# EAGLE board BMP180-Breakout-Panel-v10 (EAGLE 6.5.0), part 1 of 2
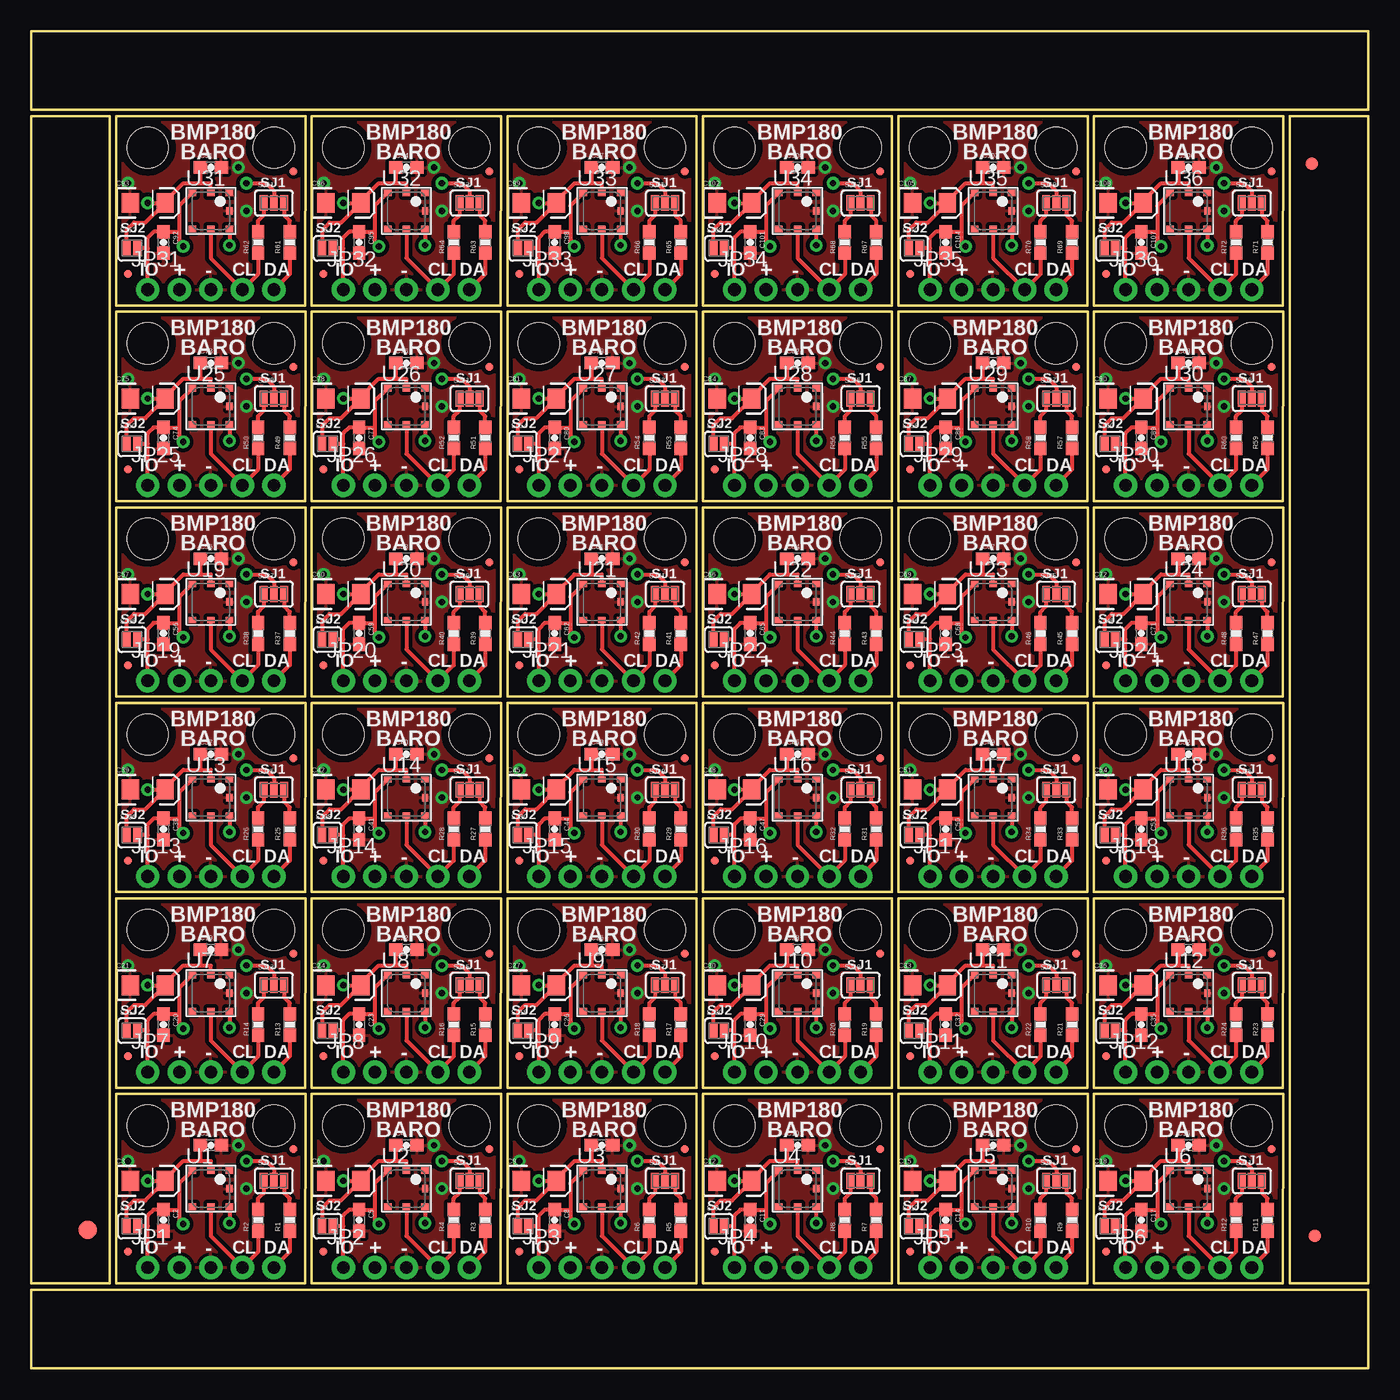
[diagram p0: board, top side]
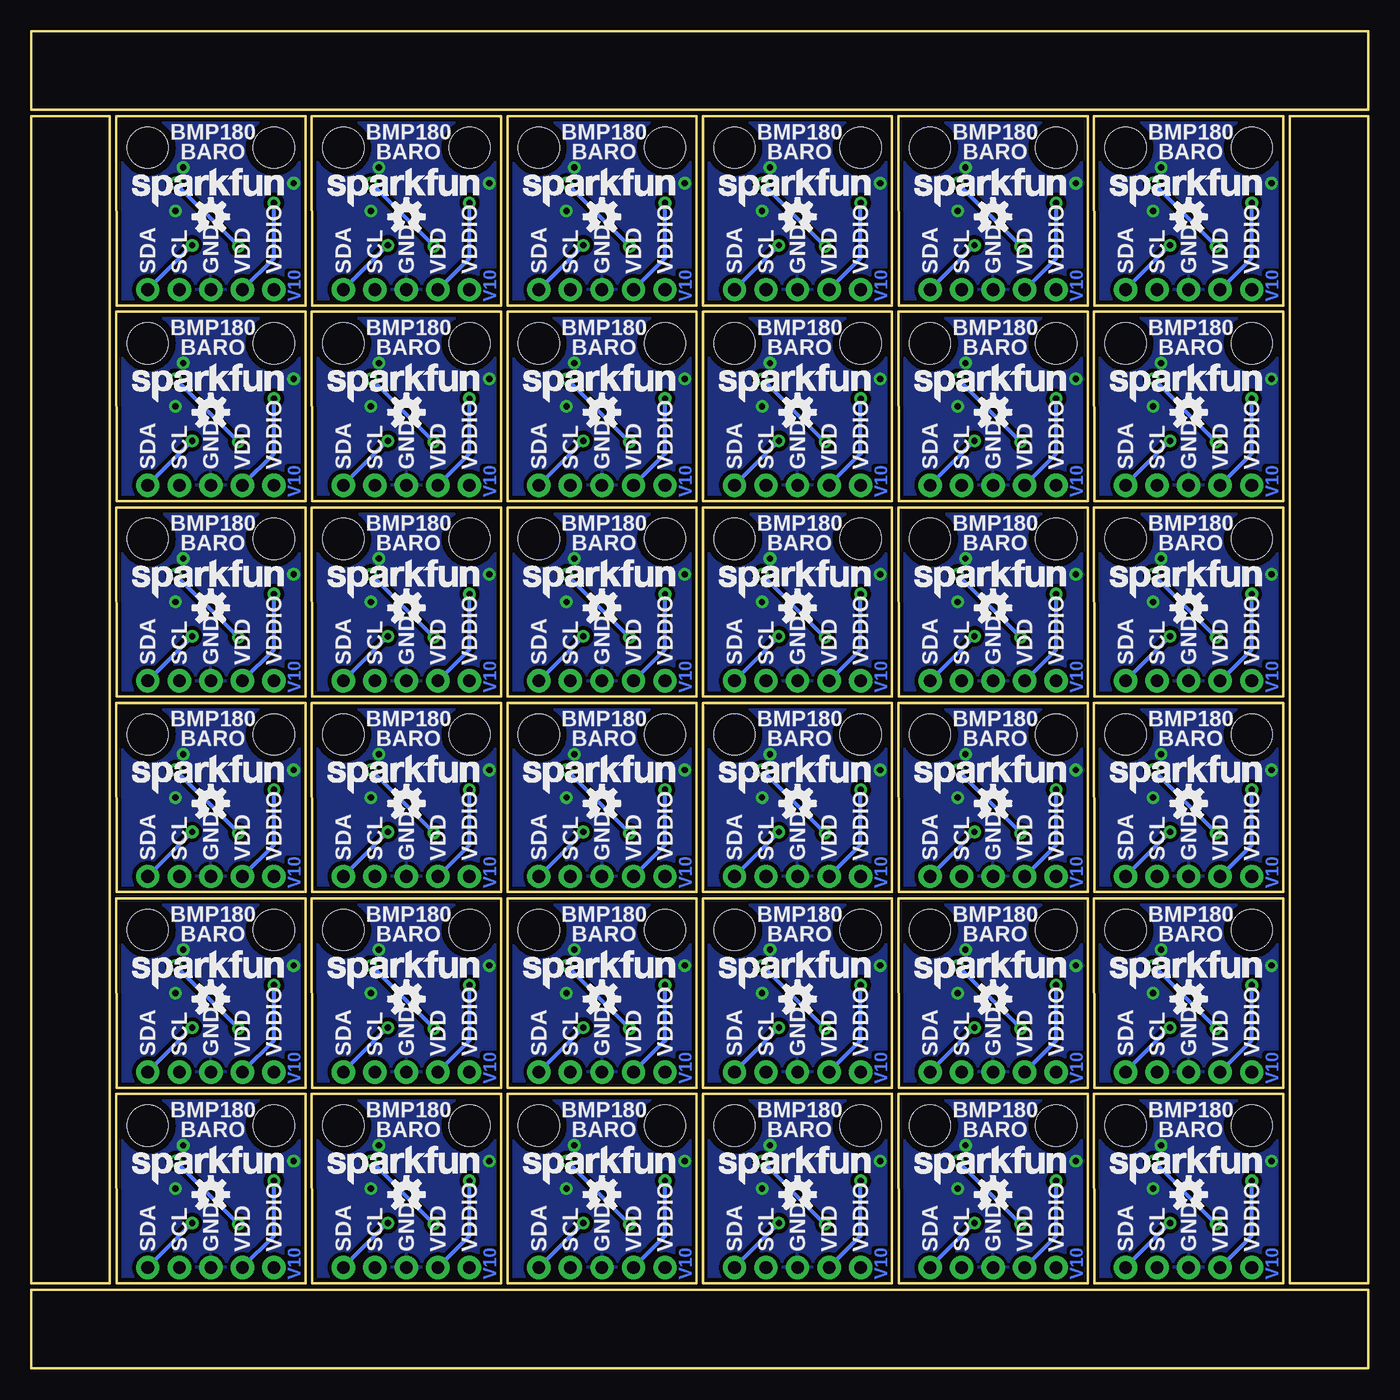
[diagram p1: board, bottom side, seen from below]

Size 107.7 x 107.7 mm. Coordinates in mm from the lower left corner, seen from the top.
Outline: 168 segments
Copper layers (1*16): Top 0.035mm / dielectric 1.5mm / Bottom 0.035mm
Design rules "SparkFun *": minimum track width 7mil, minimum drill 15mil, track to track 8mil, track to pad 8mil, pad to pad 8mil, via to via 8mil, smd to smd 8mil, copper to edge 8mil, drill to drill 8mil, minimum pad ring 12mil, minimum via ring 10mil, stop-mask expansion 4mil, vias tented up to drill 20mil, thermal gap 10mil

## Footprints (pad centres in the part's own frame; a part is rotated, then mirrored left to right if it is on the bottom)
0603-CAP = smd 1.1 x 1: 1 -0.85,0; 2 0.85,0
EIA3216 = smd 1.4 x 1.6: A 1.4,0; C -1.4,0
FIDUCIAL-1.5X3 = smd 1.5 x 1.5: 1 0,0
FIDUCIAL-1X2 = smd 1 x 1: 1 0,0
MICRO-FIDUCIAL = smd 0.635 x 0.635: 1 0,0
1X05_ROUNDONLY_NOSILK = drill 1.016 pad 1.88: 1 0,0; 2 2.54,0; 3 5.08,0; 4 7.62,0; 5 10.16,0
0603-RES = smd 1.1 x 1: 1 -0.85,0; 2 0.85,0
SJ_3_PASTE1&2&3 = smd 0.635 x 1.27: 1 -0.813,0; 2 0,0; 3 0.813,0
SJ_2S = smd 0.635 x 1.27: 1 -0.412,0; 2 0.412,0
STAND-OFF = hole 3.302: 0,0
BMP180 = smd 0.6 x 0.5: 1 1.5,1.45; 2 0,1.45; 3 -1.5,1.45; 4 -1.5,-1.45; 5 0,-1.45; 6 1.5,-1.45 | smd 0.5 x 0.6: 7 1.5,0

## Placement (x,y rotation side)
C1  0.1uF  [0603-CAP]  14.48,17.97 0 top
C2  0.1uF  [0603-CAP]  10.67,11.94 270 top
C3  10uF  [EIA3216]  9.4,15.11 0 top
C4  0.1uF  [0603-CAP]  30.23,17.97 0 top
C5  0.1uF  [0603-CAP]  26.42,11.94 270 top
C6  10uF  [EIA3216]  25.15,15.11 0 top
C7  0.1uF  [0603-CAP]  45.97,17.97 0 top
C8  0.1uF  [0603-CAP]  42.16,11.94 270 top
C9  10uF  [EIA3216]  40.89,15.11 0 top
C10  0.1uF  [0603-CAP]  61.72,17.97 0 top
C11  0.1uF  [0603-CAP]  57.91,11.94 270 top
C12  10uF  [EIA3216]  56.64,15.11 0 top
C13  0.1uF  [0603-CAP]  77.47,17.97 0 top
C14  0.1uF  [0603-CAP]  73.66,11.94 270 top
C15  10uF  [EIA3216]  72.39,15.11 0 top
C16  0.1uF  [0603-CAP]  93.22,17.97 0 top
C17  0.1uF  [0603-CAP]  89.41,11.94 270 top
C18  10uF  [EIA3216]  88.14,15.11 0 top
C19  0.1uF  [0603-CAP]  14.48,33.72 0 top
C20  0.1uF  [0603-CAP]  10.67,27.69 270 top
C21  10uF  [EIA3216]  9.4,30.86 0 top
C22  0.1uF  [0603-CAP]  30.23,33.72 0 top
C23  0.1uF  [0603-CAP]  26.42,27.69 270 top
C24  10uF  [EIA3216]  25.15,30.86 0 top
C25  0.1uF  [0603-CAP]  45.97,33.72 0 top
C26  0.1uF  [0603-CAP]  42.16,27.69 270 top
C27  10uF  [EIA3216]  40.89,30.86 0 top
C28  0.1uF  [0603-CAP]  61.72,33.72 0 top
C29  0.1uF  [0603-CAP]  57.91,27.69 270 top
C30  10uF  [EIA3216]  56.64,30.86 0 top
C31  0.1uF  [0603-CAP]  77.47,33.72 0 top
C32  0.1uF  [0603-CAP]  73.66,27.69 270 top
C33  10uF  [EIA3216]  72.39,30.86 0 top
C34  0.1uF  [0603-CAP]  93.22,33.72 0 top
C35  0.1uF  [0603-CAP]  89.41,27.69 270 top
C36  10uF  [EIA3216]  88.14,30.86 0 top
C37  0.1uF  [0603-CAP]  14.48,49.47 0 top
C38  0.1uF  [0603-CAP]  10.67,43.43 270 top
C39  10uF  [EIA3216]  9.4,46.61 0 top
C40  0.1uF  [0603-CAP]  30.23,49.47 0 top
C41  0.1uF  [0603-CAP]  26.42,43.43 270 top
C42  10uF  [EIA3216]  25.15,46.61 0 top
C43  0.1uF  [0603-CAP]  45.97,49.47 0 top
C44  0.1uF  [0603-CAP]  42.16,43.43 270 top
C45  10uF  [EIA3216]  40.89,46.61 0 top
C46  0.1uF  [0603-CAP]  61.72,49.47 0 top
C47  0.1uF  [0603-CAP]  57.91,43.43 270 top
C48  10uF  [EIA3216]  56.64,46.61 0 top
C49  0.1uF  [0603-CAP]  77.47,49.47 0 top
C50  0.1uF  [0603-CAP]  73.66,43.43 270 top
C51  10uF  [EIA3216]  72.39,46.61 0 top
C52  0.1uF  [0603-CAP]  93.22,49.47 0 top
C53  0.1uF  [0603-CAP]  89.41,43.43 270 top
C54  10uF  [EIA3216]  88.14,46.61 0 top
C55  0.1uF  [0603-CAP]  14.48,65.21 0 top
C56  0.1uF  [0603-CAP]  10.67,59.18 270 top
C57  10uF  [EIA3216]  9.4,62.36 0 top
C58  0.1uF  [0603-CAP]  30.23,65.21 0 top
C59  0.1uF  [0603-CAP]  26.42,59.18 270 top
C60  10uF  [EIA3216]  25.15,62.36 0 top
C61  0.1uF  [0603-CAP]  45.97,65.21 0 top
C62  0.1uF  [0603-CAP]  42.16,59.18 270 top
C63  10uF  [EIA3216]  40.89,62.36 0 top
C64  0.1uF  [0603-CAP]  61.72,65.21 0 top
C65  0.1uF  [0603-CAP]  57.91,59.18 270 top
C66  10uF  [EIA3216]  56.64,62.36 0 top
C67  0.1uF  [0603-CAP]  77.47,65.21 0 top
C68  0.1uF  [0603-CAP]  73.66,59.18 270 top
C69  10uF  [EIA3216]  72.39,62.36 0 top
C70  0.1uF  [0603-CAP]  93.22,65.21 0 top
C71  0.1uF  [0603-CAP]  89.41,59.18 270 top
C72  10uF  [EIA3216]  88.14,62.36 0 top
C73  0.1uF  [0603-CAP]  14.48,80.96 0 top
C74  0.1uF  [0603-CAP]  10.67,74.93 270 top
C75  10uF  [EIA3216]  9.4,78.11 0 top
C76  0.1uF  [0603-CAP]  30.23,80.96 0 top
C77  0.1uF  [0603-CAP]  26.42,74.93 270 top
C78  10uF  [EIA3216]  25.15,78.11 0 top
C79  0.1uF  [0603-CAP]  45.97,80.96 0 top
C80  0.1uF  [0603-CAP]  42.16,74.93 270 top
C81  10uF  [EIA3216]  40.89,78.11 0 top
C82  0.1uF  [0603-CAP]  61.72,80.96 0 top
C83  0.1uF  [0603-CAP]  57.91,74.93 270 top
C84  10uF  [EIA3216]  56.64,78.11 0 top
C85  0.1uF  [0603-CAP]  77.47,80.96 0 top
C86  0.1uF  [0603-CAP]  73.66,74.93 270 top
C87  10uF  [EIA3216]  72.39,78.11 0 top
C88  0.1uF  [0603-CAP]  93.22,80.96 0 top
C89  0.1uF  [0603-CAP]  89.41,74.93 270 top
C90  10uF  [EIA3216]  88.14,78.11 0 top
C91  0.1uF  [0603-CAP]  14.48,96.71 0 top
C92  0.1uF  [0603-CAP]  10.67,90.68 270 top
C93  10uF  [EIA3216]  9.4,93.85 0 top
C94  0.1uF  [0603-CAP]  30.23,96.71 0 top
C95  0.1uF  [0603-CAP]  26.42,90.68 270 top
C96  10uF  [EIA3216]  25.15,93.85 0 top
C97  0.1uF  [0603-CAP]  45.97,96.71 0 top
C98  0.1uF  [0603-CAP]  42.16,90.68 270 top
C99  10uF  [EIA3216]  40.89,93.85 0 top
C100  0.1uF  [0603-CAP]  61.72,96.71 0 top
C101  0.1uF  [0603-CAP]  57.91,90.68 270 top
C102  10uF  [EIA3216]  56.64,93.85 0 top
C103  0.1uF  [0603-CAP]  77.47,96.71 0 top
C104  0.1uF  [0603-CAP]  73.66,90.68 270 top
C105  10uF  [EIA3216]  72.39,93.85 0 top
C106  0.1uF  [0603-CAP]  93.22,96.71 0 top
C107  0.1uF  [0603-CAP]  89.41,90.68 270 top
C108  10uF  [EIA3216]  88.14,93.85 0 top
E$1  [FIDUCIAL-1.5X3]  4.57,11.18 0 top
E$4  [FIDUCIAL-1X2]  103.38,10.67 0 top
E$8  [FIDUCIAL-1X2]  103.12,97.03 180 top
FID1  FIDUCIALUFIDUCIAL  [MICRO-FIDUCIAL]  21.15,17.65 0 top
FID2  FIDUCIALUFIDUCIAL  [MICRO-FIDUCIAL]  7.81,9.4 0 top
FID3  FIDUCIALUFIDUCIAL  [MICRO-FIDUCIAL]  36.89,17.65 0 top
FID4  FIDUCIALUFIDUCIAL  [MICRO-FIDUCIAL]  23.56,9.4 0 top
FID5  FIDUCIALUFIDUCIAL  [MICRO-FIDUCIAL]  52.64,17.65 0 top
FID6  FIDUCIALUFIDUCIAL  [MICRO-FIDUCIAL]  39.31,9.4 0 top
FID7  FIDUCIALUFIDUCIAL  [MICRO-FIDUCIAL]  68.39,17.65 0 top
FID8  FIDUCIALUFIDUCIAL  [MICRO-FIDUCIAL]  55.05,9.4 0 top
FID9  FIDUCIALUFIDUCIAL  [MICRO-FIDUCIAL]  84.14,17.65 0 top
FID10  FIDUCIALUFIDUCIAL  [MICRO-FIDUCIAL]  70.8,9.4 0 top
FID11  FIDUCIALUFIDUCIAL  [MICRO-FIDUCIAL]  99.89,17.65 0 top
FID12  FIDUCIALUFIDUCIAL  [MICRO-FIDUCIAL]  86.55,9.4 0 top
FID13  FIDUCIALUFIDUCIAL  [MICRO-FIDUCIAL]  21.15,33.4 0 top
FID14  FIDUCIALUFIDUCIAL  [MICRO-FIDUCIAL]  7.81,25.15 0 top
FID15  FIDUCIALUFIDUCIAL  [MICRO-FIDUCIAL]  36.89,33.4 0 top
FID16  FIDUCIALUFIDUCIAL  [MICRO-FIDUCIAL]  23.56,25.15 0 top
FID17  FIDUCIALUFIDUCIAL  [MICRO-FIDUCIAL]  52.64,33.4 0 top
FID18  FIDUCIALUFIDUCIAL  [MICRO-FIDUCIAL]  39.31,25.15 0 top
FID19  FIDUCIALUFIDUCIAL  [MICRO-FIDUCIAL]  68.39,33.4 0 top
FID20  FIDUCIALUFIDUCIAL  [MICRO-FIDUCIAL]  55.05,25.15 0 top
FID21  FIDUCIALUFIDUCIAL  [MICRO-FIDUCIAL]  84.14,33.4 0 top
FID22  FIDUCIALUFIDUCIAL  [MICRO-FIDUCIAL]  70.8,25.15 0 top
FID23  FIDUCIALUFIDUCIAL  [MICRO-FIDUCIAL]  99.89,33.4 0 top
FID24  FIDUCIALUFIDUCIAL  [MICRO-FIDUCIAL]  86.55,25.15 0 top
FID25  FIDUCIALUFIDUCIAL  [MICRO-FIDUCIAL]  21.15,49.15 0 top
FID26  FIDUCIALUFIDUCIAL  [MICRO-FIDUCIAL]  7.81,40.89 0 top
FID27  FIDUCIALUFIDUCIAL  [MICRO-FIDUCIAL]  36.89,49.15 0 top
FID28  FIDUCIALUFIDUCIAL  [MICRO-FIDUCIAL]  23.56,40.89 0 top
FID29  FIDUCIALUFIDUCIAL  [MICRO-FIDUCIAL]  52.64,49.15 0 top
FID30  FIDUCIALUFIDUCIAL  [MICRO-FIDUCIAL]  39.31,40.89 0 top
FID31  FIDUCIALUFIDUCIAL  [MICRO-FIDUCIAL]  68.39,49.15 0 top
FID32  FIDUCIALUFIDUCIAL  [MICRO-FIDUCIAL]  55.05,40.89 0 top
FID33  FIDUCIALUFIDUCIAL  [MICRO-FIDUCIAL]  84.14,49.15 0 top
FID34  FIDUCIALUFIDUCIAL  [MICRO-FIDUCIAL]  70.8,40.89 0 top
FID35  FIDUCIALUFIDUCIAL  [MICRO-FIDUCIAL]  99.89,49.15 0 top
FID36  FIDUCIALUFIDUCIAL  [MICRO-FIDUCIAL]  86.55,40.89 0 top
FID37  FIDUCIALUFIDUCIAL  [MICRO-FIDUCIAL]  21.15,64.9 0 top
FID38  FIDUCIALUFIDUCIAL  [MICRO-FIDUCIAL]  7.81,56.64 0 top
FID39  FIDUCIALUFIDUCIAL  [MICRO-FIDUCIAL]  36.89,64.9 0 top
FID40  FIDUCIALUFIDUCIAL  [MICRO-FIDUCIAL]  23.56,56.64 0 top
FID41  FIDUCIALUFIDUCIAL  [MICRO-FIDUCIAL]  52.64,64.9 0 top
FID42  FIDUCIALUFIDUCIAL  [MICRO-FIDUCIAL]  39.31,56.64 0 top
FID43  FIDUCIALUFIDUCIAL  [MICRO-FIDUCIAL]  68.39,64.9 0 top
FID44  FIDUCIALUFIDUCIAL  [MICRO-FIDUCIAL]  55.05,56.64 0 top
FID45  FIDUCIALUFIDUCIAL  [MICRO-FIDUCIAL]  84.14,64.9 0 top
FID46  FIDUCIALUFIDUCIAL  [MICRO-FIDUCIAL]  70.8,56.64 0 top
FID47  FIDUCIALUFIDUCIAL  [MICRO-FIDUCIAL]  99.89,64.9 0 top
FID48  FIDUCIALUFIDUCIAL  [MICRO-FIDUCIAL]  86.55,56.64 0 top
FID49  FIDUCIALUFIDUCIAL  [MICRO-FIDUCIAL]  21.15,80.64 0 top
FID50  FIDUCIALUFIDUCIAL  [MICRO-FIDUCIAL]  7.81,72.39 0 top
FID51  FIDUCIALUFIDUCIAL  [MICRO-FIDUCIAL]  36.89,80.64 0 top
FID52  FIDUCIALUFIDUCIAL  [MICRO-FIDUCIAL]  23.56,72.39 0 top
FID53  FIDUCIALUFIDUCIAL  [MICRO-FIDUCIAL]  52.64,80.64 0 top
FID54  FIDUCIALUFIDUCIAL  [MICRO-FIDUCIAL]  39.31,72.39 0 top
FID55  FIDUCIALUFIDUCIAL  [MICRO-FIDUCIAL]  68.39,80.64 0 top
FID56  FIDUCIALUFIDUCIAL  [MICRO-FIDUCIAL]  55.05,72.39 0 top
FID57  FIDUCIALUFIDUCIAL  [MICRO-FIDUCIAL]  84.14,80.64 0 top
FID58  FIDUCIALUFIDUCIAL  [MICRO-FIDUCIAL]  70.8,72.39 0 top
FID59  FIDUCIALUFIDUCIAL  [MICRO-FIDUCIAL]  99.89,80.64 0 top
FID60  FIDUCIALUFIDUCIAL  [MICRO-FIDUCIAL]  86.55,72.39 0 top
FID61  FIDUCIALUFIDUCIAL  [MICRO-FIDUCIAL]  21.15,96.39 0 top
FID62  FIDUCIALUFIDUCIAL  [MICRO-FIDUCIAL]  7.81,88.14 0 top
FID63  FIDUCIALUFIDUCIAL  [MICRO-FIDUCIAL]  36.89,96.39 0 top
FID64  FIDUCIALUFIDUCIAL  [MICRO-FIDUCIAL]  23.56,88.14 0 top
FID65  FIDUCIALUFIDUCIAL  [MICRO-FIDUCIAL]  52.64,96.39 0 top
FID66  FIDUCIALUFIDUCIAL  [MICRO-FIDUCIAL]  39.31,88.14 0 top
FID67  FIDUCIALUFIDUCIAL  [MICRO-FIDUCIAL]  68.39,96.39 0 top
FID68  FIDUCIALUFIDUCIAL  [MICRO-FIDUCIAL]  55.05,88.14 0 top
FID69  FIDUCIALUFIDUCIAL  [MICRO-FIDUCIAL]  84.14,96.39 0 top
FID70  FIDUCIALUFIDUCIAL  [MICRO-FIDUCIAL]  70.8,88.14 0 top
FID71  FIDUCIALUFIDUCIAL  [MICRO-FIDUCIAL]  99.89,96.39 0 top
FID72  FIDUCIALUFIDUCIAL  [MICRO-FIDUCIAL]  86.55,88.14 0 top
JP1  [1X05_ROUNDONLY_NOSILK]  9.4,8.13 0 top
JP2  [1X05_ROUNDONLY_NOSILK]  25.15,8.13 0 top
JP3  [1X05_ROUNDONLY_NOSILK]  40.89,8.13 0 top
JP4  [1X05_ROUNDONLY_NOSILK]  56.64,8.13 0 top
JP5  [1X05_ROUNDONLY_NOSILK]  72.39,8.13 0 top
JP6  [1X05_ROUNDONLY_NOSILK]  88.14,8.13 0 top
JP7  [1X05_ROUNDONLY_NOSILK]  9.4,23.88 0 top
JP8  [1X05_ROUNDONLY_NOSILK]  25.15,23.88 0 top
JP9  [1X05_ROUNDONLY_NOSILK]  40.89,23.88 0 top
JP10  [1X05_ROUNDONLY_NOSILK]  56.64,23.88 0 top
JP11  [1X05_ROUNDONLY_NOSILK]  72.39,23.88 0 top
JP12  [1X05_ROUNDONLY_NOSILK]  88.14,23.88 0 top
JP13  [1X05_ROUNDONLY_NOSILK]  9.4,39.62 0 top
JP14  [1X05_ROUNDONLY_NOSILK]  25.15,39.62 0 top
JP15  [1X05_ROUNDONLY_NOSILK]  40.89,39.62 0 top
JP16  [1X05_ROUNDONLY_NOSILK]  56.64,39.62 0 top
JP17  [1X05_ROUNDONLY_NOSILK]  72.39,39.62 0 top
JP18  [1X05_ROUNDONLY_NOSILK]  88.14,39.62 0 top
JP19  [1X05_ROUNDONLY_NOSILK]  9.4,55.37 0 top
JP20  [1X05_ROUNDONLY_NOSILK]  25.15,55.37 0 top
JP21  [1X05_ROUNDONLY_NOSILK]  40.89,55.37 0 top
JP22  [1X05_ROUNDONLY_NOSILK]  56.64,55.37 0 top
JP23  [1X05_ROUNDONLY_NOSILK]  72.39,55.37 0 top
JP24  [1X05_ROUNDONLY_NOSILK]  88.14,55.37 0 top
JP25  [1X05_ROUNDONLY_NOSILK]  9.4,71.12 0 top
JP26  [1X05_ROUNDONLY_NOSILK]  25.15,71.12 0 top
JP27  [1X05_ROUNDONLY_NOSILK]  40.89,71.12 0 top
JP28  [1X05_ROUNDONLY_NOSILK]  56.64,71.12 0 top
JP29  [1X05_ROUNDONLY_NOSILK]  72.39,71.12 0 top
JP30  [1X05_ROUNDONLY_NOSILK]  88.14,71.12 0 top
JP31  [1X05_ROUNDONLY_NOSILK]  9.4,86.87 0 top
JP32  [1X05_ROUNDONLY_NOSILK]  25.15,86.87 0 top
JP33  [1X05_ROUNDONLY_NOSILK]  40.89,86.87 0 top
JP34  [1X05_ROUNDONLY_NOSILK]  56.64,86.87 0 top
JP35  [1X05_ROUNDONLY_NOSILK]  72.39,86.87 0 top
JP36  [1X05_ROUNDONLY_NOSILK]  88.14,86.87 0 top
LOGO1  LOGO-SFENW2  [SFE-NEW-WEB]  20.83,14.8 0 bottom
LOGO2  OSHW-LOGOS  [OSHW-LOGO-S]  14.48,14 0 bottom
LOGO3  LOGO-SFENW2  [SFE-NEW-WEB]  36.58,14.8 0 bottom
LOGO4  OSHW-LOGOS  [OSHW-LOGO-S]  30.23,14 0 bottom
LOGO5  LOGO-SFENW2  [SFE-NEW-WEB]  52.32,14.8 0 bottom
LOGO6  OSHW-LOGOS  [OSHW-LOGO-S]  45.97,14 0 bottom
LOGO7  LOGO-SFENW2  [SFE-NEW-WEB]  68.07,14.8 0 bottom
LOGO8  OSHW-LOGOS  [OSHW-LOGO-S]  61.72,14 0 bottom
LOGO9  LOGO-SFENW2  [SFE-NEW-WEB]  83.82,14.8 0 bottom
LOGO10  OSHW-LOGOS  [OSHW-LOGO-S]  77.47,14 0 bottom
LOGO11  LOGO-SFENW2  [SFE-NEW-WEB]  99.57,14.8 0 bottom
LOGO12  OSHW-LOGOS  [OSHW-LOGO-S]  93.22,14 0 bottom
LOGO13  LOGO-SFENW2  [SFE-NEW-WEB]  20.83,30.54 0 bottom
LOGO14  OSHW-LOGOS  [OSHW-LOGO-S]  14.48,29.75 0 bottom
LOGO15  LOGO-SFENW2  [SFE-NEW-WEB]  36.58,30.54 0 bottom
LOGO16  OSHW-LOGOS  [OSHW-LOGO-S]  30.23,29.75 0 bottom
LOGO17  LOGO-SFENW2  [SFE-NEW-WEB]  52.32,30.54 0 bottom
LOGO18  OSHW-LOGOS  [OSHW-LOGO-S]  45.97,29.75 0 bottom
LOGO19  LOGO-SFENW2  [SFE-NEW-WEB]  68.07,30.54 0 bottom
LOGO20  OSHW-LOGOS  [OSHW-LOGO-S]  61.72,29.75 0 bottom
LOGO21  LOGO-SFENW2  [SFE-NEW-WEB]  83.82,30.54 0 bottom
LOGO22  OSHW-LOGOS  [OSHW-LOGO-S]  77.47,29.75 0 bottom
LOGO23  LOGO-SFENW2  [SFE-NEW-WEB]  99.57,30.54 0 bottom
LOGO24  OSHW-LOGOS  [OSHW-LOGO-S]  93.22,29.75 0 bottom
LOGO25  LOGO-SFENW2  [SFE-NEW-WEB]  20.83,46.29 0 bottom
LOGO26  OSHW-LOGOS  [OSHW-LOGO-S]  14.48,45.5 0 bottom
LOGO27  LOGO-SFENW2  [SFE-NEW-WEB]  36.58,46.29 0 bottom
LOGO28  OSHW-LOGOS  [OSHW-LOGO-S]  30.23,45.5 0 bottom
LOGO29  LOGO-SFENW2  [SFE-NEW-WEB]  52.32,46.29 0 bottom
LOGO30  OSHW-LOGOS  [OSHW-LOGO-S]  45.97,45.5 0 bottom
LOGO31  LOGO-SFENW2  [SFE-NEW-WEB]  68.07,46.29 0 bottom
LOGO32  OSHW-LOGOS  [OSHW-LOGO-S]  61.72,45.5 0 bottom
LOGO33  LOGO-SFENW2  [SFE-NEW-WEB]  83.82,46.29 0 bottom
LOGO34  OSHW-LOGOS  [OSHW-LOGO-S]  77.47,45.5 0 bottom
LOGO35  LOGO-SFENW2  [SFE-NEW-WEB]  99.57,46.29 0 bottom
LOGO36  OSHW-LOGOS  [OSHW-LOGO-S]  93.22,45.5 0 bottom
LOGO37  LOGO-SFENW2  [SFE-NEW-WEB]  20.83,62.04 0 bottom
LOGO38  OSHW-LOGOS  [OSHW-LOGO-S]  14.48,61.25 0 bottom
LOGO39  LOGO-SFENW2  [SFE-NEW-WEB]  36.58,62.04 0 bottom
LOGO40  OSHW-LOGOS  [OSHW-LOGO-S]  30.23,61.25 0 bottom
LOGO41  LOGO-SFENW2  [SFE-NEW-WEB]  52.32,62.04 0 bottom
LOGO42  OSHW-LOGOS  [OSHW-LOGO-S]  45.97,61.25 0 bottom
LOGO43  LOGO-SFENW2  [SFE-NEW-WEB]  68.07,62.04 0 bottom
LOGO44  OSHW-LOGOS  [OSHW-LOGO-S]  61.72,61.25 0 bottom
LOGO45  LOGO-SFENW2  [SFE-NEW-WEB]  83.82,62.04 0 bottom
LOGO46  OSHW-LOGOS  [OSHW-LOGO-S]  77.47,61.25 0 bottom
LOGO47  LOGO-SFENW2  [SFE-NEW-WEB]  99.57,62.04 0 bottom
LOGO48  OSHW-LOGOS  [OSHW-LOGO-S]  93.22,61.25 0 bottom
LOGO49  LOGO-SFENW2  [SFE-NEW-WEB]  20.83,77.79 0 bottom
LOGO50  OSHW-LOGOS  [OSHW-LOGO-S]  14.48,76.99 0 bottom
LOGO51  LOGO-SFENW2  [SFE-NEW-WEB]  36.58,77.79 0 bottom
LOGO52  OSHW-LOGOS  [OSHW-LOGO-S]  30.23,76.99 0 bottom
LOGO53  LOGO-SFENW2  [SFE-NEW-WEB]  52.32,77.79 0 bottom
LOGO54  OSHW-LOGOS  [OSHW-LOGO-S]  45.97,76.99 0 bottom
LOGO55  LOGO-SFENW2  [SFE-NEW-WEB]  68.07,77.79 0 bottom
LOGO56  OSHW-LOGOS  [OSHW-LOGO-S]  61.72,76.99 0 bottom
LOGO57  LOGO-SFENW2  [SFE-NEW-WEB]  83.82,77.79 0 bottom
LOGO58  OSHW-LOGOS  [OSHW-LOGO-S]  77.47,76.99 0 bottom
LOGO59  LOGO-SFENW2  [SFE-NEW-WEB]  99.57,77.79 0 bottom
LOGO60  OSHW-LOGOS  [OSHW-LOGO-S]  93.22,76.99 0 bottom
LOGO61  LOGO-SFENW2  [SFE-NEW-WEB]  20.83,93.54 0 bottom
LOGO62  OSHW-LOGOS  [OSHW-LOGO-S]  14.48,92.74 0 bottom
LOGO63  LOGO-SFENW2  [SFE-NEW-WEB]  36.58,93.54 0 bottom
LOGO64  OSHW-LOGOS  [OSHW-LOGO-S]  30.23,92.74 0 bottom
LOGO65  LOGO-SFENW2  [SFE-NEW-WEB]  52.32,93.54 0 bottom
LOGO66  OSHW-LOGOS  [OSHW-LOGO-S]  45.97,92.74 0 bottom
LOGO67  LOGO-SFENW2  [SFE-NEW-WEB]  68.07,93.54 0 bottom
LOGO68  OSHW-LOGOS  [OSHW-LOGO-S]  61.72,92.74 0 bottom
LOGO69  LOGO-SFENW2  [SFE-NEW-WEB]  83.82,93.54 0 bottom
LOGO70  OSHW-LOGOS  [OSHW-LOGO-S]  77.47,92.74 0 bottom
LOGO71  LOGO-SFENW2  [SFE-NEW-WEB]  99.57,93.54 0 bottom
LOGO72  OSHW-LOGOS  [OSHW-LOGO-S]  93.22,92.74 0 bottom
R1  4.7K  [0603-RES]  20.83,11.94 90 top
R2  4.7K  [0603-RES]  18.29,11.94 90 top
R3  4.7K  [0603-RES]  36.58,11.94 90 top
R4  4.7K  [0603-RES]  34.04,11.94 90 top
R5  4.7K  [0603-RES]  52.32,11.94 90 top
R6  4.7K  [0603-RES]  49.78,11.94 90 top
R7  4.7K  [0603-RES]  68.07,11.94 90 top
R8  4.7K  [0603-RES]  65.53,11.94 90 top
R9  4.7K  [0603-RES]  83.82,11.94 90 top
R10  4.7K  [0603-RES]  81.28,11.94 90 top
R11  4.7K  [0603-RES]  99.57,11.94 90 top
R12  4.7K  [0603-RES]  97.03,11.94 90 top
R13  4.7K  [0603-RES]  20.83,27.69 90 top
R14  4.7K  [0603-RES]  18.29,27.69 90 top
R15  4.7K  [0603-RES]  36.58,27.69 90 top
R16  4.7K  [0603-RES]  34.04,27.69 90 top
R17  4.7K  [0603-RES]  52.32,27.69 90 top
R18  4.7K  [0603-RES]  49.78,27.69 90 top
R19  4.7K  [0603-RES]  68.07,27.69 90 top
R20  4.7K  [0603-RES]  65.53,27.69 90 top
R21  4.7K  [0603-RES]  83.82,27.69 90 top
R22  4.7K  [0603-RES]  81.28,27.69 90 top
R23  4.7K  [0603-RES]  99.57,27.69 90 top
R24  4.7K  [0603-RES]  97.03,27.69 90 top
R25  4.7K  [0603-RES]  20.83,43.43 90 top
R26  4.7K  [0603-RES]  18.29,43.43 90 top
R27  4.7K  [0603-RES]  36.58,43.43 90 top
R28  4.7K  [0603-RES]  34.04,43.43 90 top
R29  4.7K  [0603-RES]  52.32,43.43 90 top
R30  4.7K  [0603-RES]  49.78,43.43 90 top
R31  4.7K  [0603-RES]  68.07,43.43 90 top
R32  4.7K  [0603-RES]  65.53,43.43 90 top
R33  4.7K  [0603-RES]  83.82,43.43 90 top
R34  4.7K  [0603-RES]  81.28,43.43 90 top
R35  4.7K  [0603-RES]  99.57,43.43 90 top
R36  4.7K  [0603-RES]  97.03,43.43 90 top
R37  4.7K  [0603-RES]  20.83,59.18 90 top
R38  4.7K  [0603-RES]  18.29,59.18 90 top
R39  4.7K  [0603-RES]  36.58,59.18 90 top
R40  4.7K  [0603-RES]  34.04,59.18 90 top
R41  4.7K  [0603-RES]  52.32,59.18 90 top
R42  4.7K  [0603-RES]  49.78,59.18 90 top
R43  4.7K  [0603-RES]  68.07,59.18 90 top
R44  4.7K  [0603-RES]  65.53,59.18 90 top
R45  4.7K  [0603-RES]  83.82,59.18 90 top
R46  4.7K  [0603-RES]  81.28,59.18 90 top
R47  4.7K  [0603-RES]  99.57,59.18 90 top
R48  4.7K  [0603-RES]  97.03,59.18 90 top
R49  4.7K  [0603-RES]  20.83,74.93 90 top
R50  4.7K  [0603-RES]  18.29,74.93 90 top
R51  4.7K  [0603-RES]  36.58,74.93 90 top
R52  4.7K  [0603-RES]  34.04,74.93 90 top
R53  4.7K  [0603-RES]  52.32,74.93 90 top
R54  4.7K  [0603-RES]  49.78,74.93 90 top
R55  4.7K  [0603-RES]  68.07,74.93 90 top
R56  4.7K  [0603-RES]  65.53,74.93 90 top
R57  4.7K  [0603-RES]  83.82,74.93 90 top
R58  4.7K  [0603-RES]  81.28,74.93 90 top
R59  4.7K  [0603-RES]  99.57,74.93 90 top
R60  4.7K  [0603-RES]  97.03,74.93 90 top
R61  4.7K  [0603-RES]  20.83,90.68 90 top
R62  4.7K  [0603-RES]  18.29,90.68 90 top
R63  4.7K  [0603-RES]  36.58,90.68 90 top
R64  4.7K  [0603-RES]  34.04,90.68 90 top
R65  4.7K  [0603-RES]  52.32,90.68 90 top
R66  4.7K  [0603-RES]  49.78,90.68 90 top
R67  4.7K  [0603-RES]  68.07,90.68 90 top
R68  4.7K  [0603-RES]  65.53,90.68 90 top
R69  4.7K  [0603-RES]  83.82,90.68 90 top
R70  4.7K  [0603-RES]  81.28,90.68 90 top
R71  4.7K  [0603-RES]  99.57,90.68 90 top
R72  4.7K  [0603-RES]  97.03,90.68 90 top
SJ1  [SJ_3_PASTE1&2&3]  19.56,15.11 0 top
SJ2  [SJ_2S]  8.13,11.46 0 top
SJ3  [SJ_3_PASTE1&2&3]  35.31,15.11 0 top
SJ4  [SJ_2S]  23.88,11.46 0 top
SJ5  [SJ_3_PASTE1&2&3]  51.05,15.11 0 top
SJ6  [SJ_2S]  39.62,11.46 0 top
SJ7  [SJ_3_PASTE1&2&3]  66.8,15.11 0 top
SJ8  [SJ_2S]  55.37,11.46 0 top
SJ9  [SJ_3_PASTE1&2&3]  82.55,15.11 0 top
SJ10  [SJ_2S]  71.12,11.46 0 top
SJ11  [SJ_3_PASTE1&2&3]  98.3,15.11 0 top
SJ12  [SJ_2S]  86.87,11.46 0 top
SJ13  [SJ_3_PASTE1&2&3]  19.56,30.86 0 top
SJ14  [SJ_2S]  8.13,27.21 0 top
SJ15  [SJ_3_PASTE1&2&3]  35.31,30.86 0 top
SJ16  [SJ_2S]  23.88,27.21 0 top
SJ17  [SJ_3_PASTE1&2&3]  51.05,30.86 0 top
SJ18  [SJ_2S]  39.62,27.21 0 top
SJ19  [SJ_3_PASTE1&2&3]  66.8,30.86 0 top
SJ20  [SJ_2S]  55.37,27.21 0 top
SJ21  [SJ_3_PASTE1&2&3]  82.55,30.86 0 top
SJ22  [SJ_2S]  71.12,27.21 0 top
SJ23  [SJ_3_PASTE1&2&3]  98.3,30.86 0 top
SJ24  [SJ_2S]  86.87,27.21 0 top
SJ25  [SJ_3_PASTE1&2&3]  19.56,46.61 0 top
SJ26  [SJ_2S]  8.13,42.96 0 top
SJ27  [SJ_3_PASTE1&2&3]  35.31,46.61 0 top
SJ28  [SJ_2S]  23.88,42.96 0 top
SJ29  [SJ_3_PASTE1&2&3]  51.05,46.61 0 top
SJ30  [SJ_2S]  39.62,42.96 0 top
SJ31  [SJ_3_PASTE1&2&3]  66.8,46.61 0 top
SJ32  [SJ_2S]  55.37,42.96 0 top
SJ33  [SJ_3_PASTE1&2&3]  82.55,46.61 0 top
SJ34  [SJ_2S]  71.12,42.96 0 top
SJ35  [SJ_3_PASTE1&2&3]  98.3,46.61 0 top
SJ36  [SJ_2S]  86.87,42.96 0 top
SJ37  [SJ_3_PASTE1&2&3]  19.56,62.36 0 top
SJ38  [SJ_2S]  8.13,58.71 0 top
SJ39  [SJ_3_PASTE1&2&3]  35.31,62.36 0 top
SJ40  [SJ_2S]  23.88,58.71 0 top
SJ41  [SJ_3_PASTE1&2&3]  51.05,62.36 0 top
SJ42  [SJ_2S]  39.62,58.71 0 top
SJ43  [SJ_3_PASTE1&2&3]  66.8,62.36 0 top
SJ44  [SJ_2S]  55.37,58.71 0 top
SJ45  [SJ_3_PASTE1&2&3]  82.55,62.36 0 top
SJ46  [SJ_2S]  71.12,58.71 0 top
SJ47  [SJ_3_PASTE1&2&3]  98.3,62.36 0 top
SJ48  [SJ_2S]  86.87,58.71 0 top
SJ49  [SJ_3_PASTE1&2&3]  19.56,78.11 0 top
SJ50  [SJ_2S]  8.13,74.45 0 top
SJ51  [SJ_3_PASTE1&2&3]  35.31,78.11 0 top
SJ52  [SJ_2S]  23.88,74.45 0 top
SJ53  [SJ_3_PASTE1&2&3]  51.05,78.11 0 top
SJ54  [SJ_2S]  39.62,74.45 0 top
SJ55  [SJ_3_PASTE1&2&3]  66.8,78.11 0 top
SJ56  [SJ_2S]  55.37,74.45 0 top
SJ57  [SJ_3_PASTE1&2&3]  82.55,78.11 0 top
SJ58  [SJ_2S]  71.12,74.45 0 top
SJ59  [SJ_3_PASTE1&2&3]  98.3,78.11 0 top
SJ60  [SJ_2S]  86.87,74.45 0 top
SJ61  [SJ_3_PASTE1&2&3]  19.56,93.85 0 top
SJ62  [SJ_2S]  8.13,90.2 0 top
SJ63  [SJ_3_PASTE1&2&3]  35.31,93.85 0 top
SJ64  [SJ_2S]  23.88,90.2 0 top
SJ65  [SJ_3_PASTE1&2&3]  51.05,93.85 0 top
SJ66  [SJ_2S]  39.62,90.2 0 top
SJ67  [SJ_3_PASTE1&2&3]  66.8,93.85 0 top
SJ68  [SJ_2S]  55.37,90.2 0 top
SJ69  [SJ_3_PASTE1&2&3]  82.55,93.85 0 top
SJ70  [SJ_2S]  71.12,90.2 0 top
SJ71  [SJ_3_PASTE1&2&3]  98.3,93.85 0 top
SJ72  [SJ_2S]  86.87,90.2 0 top
STANDOFF1  STAND-OFF  [STAND-OFF]  19.56,19.56 0 top
STANDOFF2  STAND-OFF  [STAND-OFF]  9.4,19.56 0 top
STANDOFF3  STAND-OFF  [STAND-OFF]  35.31,19.56 0 top
STANDOFF4  STAND-OFF  [STAND-OFF]  25.15,19.56 0 top
STANDOFF5  STAND-OFF  [STAND-OFF]  51.05,19.56 0 top
STANDOFF6  STAND-OFF  [STAND-OFF]  40.89,19.56 0 top
STANDOFF7  STAND-OFF  [STAND-OFF]  66.8,19.56 0 top
STANDOFF8  STAND-OFF  [STAND-OFF]  56.64,19.56 0 top
STANDOFF9  STAND-OFF  [STAND-OFF]  82.55,19.56 0 top
STANDOFF10  STAND-OFF  [STAND-OFF]  72.39,19.56 0 top
STANDOFF11  STAND-OFF  [STAND-OFF]  98.3,19.56 0 top
STANDOFF12  STAND-OFF  [STAND-OFF]  88.14,19.56 0 top
STANDOFF13  STAND-OFF  [STAND-OFF]  19.56,35.31 0 top
STANDOFF14  STAND-OFF  [STAND-OFF]  9.4,35.31 0 top
STANDOFF15  STAND-OFF  [STAND-OFF]  35.31,35.31 0 top
STANDOFF16  STAND-OFF  [STAND-OFF]  25.15,35.31 0 top
STANDOFF17  STAND-OFF  [STAND-OFF]  51.05,35.31 0 top
STANDOFF18  STAND-OFF  [STAND-OFF]  40.89,35.31 0 top
STANDOFF19  STAND-OFF  [STAND-OFF]  66.8,35.31 0 top
STANDOFF20  STAND-OFF  [STAND-OFF]  56.64,35.31 0 top
STANDOFF21  STAND-OFF  [STAND-OFF]  82.55,35.31 0 top
STANDOFF22  STAND-OFF  [STAND-OFF]  72.39,35.31 0 top
STANDOFF23  STAND-OFF  [STAND-OFF]  98.3,35.31 0 top
STANDOFF24  STAND-OFF  [STAND-OFF]  88.14,35.31 0 top
STANDOFF25  STAND-OFF  [STAND-OFF]  19.56,51.05 0 top
STANDOFF26  STAND-OFF  [STAND-OFF]  9.4,51.05 0 top
STANDOFF27  STAND-OFF  [STAND-OFF]  35.31,51.05 0 top
STANDOFF28  STAND-OFF  [STAND-OFF]  25.15,51.05 0 top
STANDOFF29  STAND-OFF  [STAND-OFF]  51.05,51.05 0 top
STANDOFF30  STAND-OFF  [STAND-OFF]  40.89,51.05 0 top
STANDOFF31  STAND-OFF  [STAND-OFF]  66.8,51.05 0 top
STANDOFF32  STAND-OFF  [STAND-OFF]  56.64,51.05 0 top
STANDOFF33  STAND-OFF  [STAND-OFF]  82.55,51.05 0 top
STANDOFF34  STAND-OFF  [STAND-OFF]  72.39,51.05 0 top
STANDOFF35  STAND-OFF  [STAND-OFF]  98.3,51.05 0 top
STANDOFF36  STAND-OFF  [STAND-OFF]  88.14,51.05 0 top
STANDOFF37  STAND-OFF  [STAND-OFF]  19.56,66.8 0 top
STANDOFF38  STAND-OFF  [STAND-OFF]  9.4,66.8 0 top
STANDOFF39  STAND-OFF  [STAND-OFF]  35.31,66.8 0 top
STANDOFF40  STAND-OFF  [STAND-OFF]  25.15,66.8 0 top
STANDOFF41  STAND-OFF  [STAND-OFF]  51.05,66.8 0 top
STANDOFF42  STAND-OFF  [STAND-OFF]  40.89,66.8 0 top
STANDOFF43  STAND-OFF  [STAND-OFF]  66.8,66.8 0 top
STANDOFF44  STAND-OFF  [STAND-OFF]  56.64,66.8 0 top
STANDOFF45  STAND-OFF  [STAND-OFF]  82.55,66.8 0 top
STANDOFF46  STAND-OFF  [STAND-OFF]  72.39,66.8 0 top
STANDOFF47  STAND-OFF  [STAND-OFF]  98.3,66.8 0 top
STANDOFF48  STAND-OFF  [STAND-OFF]  88.14,66.8 0 top
STANDOFF49  STAND-OFF  [STAND-OFF]  19.56,82.55 0 top
STANDOFF50  STAND-OFF  [STAND-OFF]  9.4,82.55 0 top
STANDOFF51  STAND-OFF  [STAND-OFF]  35.31,82.55 0 top
STANDOFF52  STAND-OFF  [STAND-OFF]  25.15,82.55 0 top
STANDOFF53  STAND-OFF  [STAND-OFF]  51.05,82.55 0 top
STANDOFF54  STAND-OFF  [STAND-OFF]  40.89,82.55 0 top
STANDOFF55  STAND-OFF  [STAND-OFF]  66.8,82.55 0 top
STANDOFF56  STAND-OFF  [STAND-OFF]  56.64,82.55 0 top
STANDOFF57  STAND-OFF  [STAND-OFF]  82.55,82.55 0 top
STANDOFF58  STAND-OFF  [STAND-OFF]  72.39,82.55 0 top
STANDOFF59  STAND-OFF  [STAND-OFF]  98.3,82.55 0 top
STANDOFF60  STAND-OFF  [STAND-OFF]  88.14,82.55 0 top
STANDOFF61  STAND-OFF  [STAND-OFF]  19.56,98.3 0 top
STANDOFF62  STAND-OFF  [STAND-OFF]  9.4,98.3 0 top
STANDOFF63  STAND-OFF  [STAND-OFF]  35.31,98.3 0 top
STANDOFF64  STAND-OFF  [STAND-OFF]  25.15,98.3 0 top
STANDOFF65  STAND-OFF  [STAND-OFF]  51.05,98.3 0 top
STANDOFF66  STAND-OFF  [STAND-OFF]  40.89,98.3 0 top
STANDOFF67  STAND-OFF  [STAND-OFF]  66.8,98.3 0 top
STANDOFF68  STAND-OFF  [STAND-OFF]  56.64,98.3 0 top
STANDOFF69  STAND-OFF  [STAND-OFF]  82.55,98.3 0 top
STANDOFF70  STAND-OFF  [STAND-OFF]  72.39,98.3 0 top
STANDOFF71  STAND-OFF  [STAND-OFF]  98.3,98.3 0 top
STANDOFF72  STAND-OFF  [STAND-OFF]  88.14,98.3 0 top
U1  BMP180  [BMP180]  14.48,14.48 0 top
U2  BMP180  [BMP180]  30.23,14.48 0 top
U3  BMP180  [BMP180]  45.97,14.48 0 top
U4  BMP180  [BMP180]  61.72,14.48 0 top
U5  BMP180  [BMP180]  77.47,14.48 0 top
U6  BMP180  [BMP180]  93.22,14.48 0 top
U7  BMP180  [BMP180]  14.48,30.23 0 top
U8  BMP180  [BMP180]  30.23,30.23 0 top
U9  BMP180  [BMP180]  45.97,30.23 0 top
U10  BMP180  [BMP180]  61.72,30.23 0 top
U11  BMP180  [BMP180]  77.47,30.23 0 top
U12  BMP180  [BMP180]  93.22,30.23 0 top
U13  BMP180  [BMP180]  14.48,45.97 0 top
U14  BMP180  [BMP180]  30.23,45.97 0 top
U15  BMP180  [BMP180]  45.97,45.97 0 top
U16  BMP180  [BMP180]  61.72,45.97 0 top
U17  BMP180  [BMP180]  77.47,45.97 0 top
U18  BMP180  [BMP180]  93.22,45.97 0 top
U19  BMP180  [BMP180]  14.48,61.72 0 top
U20  BMP180  [BMP180]  30.23,61.72 0 top
U21  BMP180  [BMP180]  45.97,61.72 0 top
U22  BMP180  [BMP180]  61.72,61.72 0 top
U23  BMP180  [BMP180]  77.47,61.72 0 top
U24  BMP180  [BMP180]  93.22,61.72 0 top
U25  BMP180  [BMP180]  14.48,77.47 0 top
U26  BMP180  [BMP180]  30.23,77.47 0 top
U27  BMP180  [BMP180]  45.97,77.47 0 top
U28  BMP180  [BMP180]  61.72,77.47 0 top
U29  BMP180  [BMP180]  77.47,77.47 0 top
U30  BMP180  [BMP180]  93.22,77.47 0 top
U31  BMP180  [BMP180]  14.48,93.22 0 top
U32  BMP180  [BMP180]  30.23,93.22 0 top
U33  BMP180  [BMP180]  45.97,93.22 0 top
U34  BMP180  [BMP180]  61.72,93.22 0 top
U35  BMP180  [BMP180]  77.47,93.22 0 top
U36  BMP180  [BMP180]  93.22,93.22 0 top

## Library data of the parts
C1 C2 C4 C5 C7 C8 C10 C11 C13 C14 C16 C17 C19 C20 C22 C23 C25 C26 C28 C29 C31 C32 C34 C35 C37 C38 C40 C41 C43 C44 C46 C47 C49 C50 C52 C53 C55 C56 C58 C59 C61 C62 C64 C65 C67 C68 C70 C71 C73 C74 C76 C77 C79 C80 C82 C83 C85 C86 C88 C89 C91 C92 C94 C95 C97 C98 C100 C101 C103 C104 C106 C107 = SparkFun-Capacitors
C3 C6 C9 C12 C15 C18 C21 C24 C27 C30 C33 C36 C39 C42 C45 C48 C51 C54 C57 C60 C63 C66 C69 C72 C75 C78 C81 C84 C87 C90 C93 C96 C99 C102 C105 C108 = SparkFun-Capacitors; PROD_ID: CAP-00811
E$1 E$4 E$8 FID1-FID72 LOGO1-LOGO72 = SparkFun-Aesthetics
JP1-JP36 SJ1-SJ72 = mike-temp
R1-R72 = SparkFun-Passives
STANDOFF1-STANDOFF72 = SparkFun-Electromechanical
U1-U36 = SparkFun-Sensors

## Nets
GND: C1.2 C2.2 C3.C JP1.3 U1.7
GND1: C4.2 C5.2 C6.C JP2.3 U2.7
GND2: C7.2 C8.2 C9.C JP3.3 U3.7
GND3: C10.2 C11.2 C12.C JP4.3 U4.7
GND4: C13.2 C14.2 C15.C JP5.3 U5.7
GND5: C16.2 C17.2 C18.C JP6.3 U6.7
GND6: C19.2 C20.2 C21.C JP7.3 U7.7
GND7: C22.2 C23.2 C24.C JP8.3 U8.7
GND8: C25.2 C26.2 C27.C JP9.3 U9.7
GND9: C28.2 C29.2 C30.C JP10.3 U10.7
GND10: C31.2 C32.2 C33.C JP11.3 U11.7
GND11: C34.2 C35.2 C36.C JP12.3 U12.7
GND12: C37.2 C38.2 C39.C JP13.3 U13.7
GND13: C40.2 C41.2 C42.C JP14.3 U14.7
GND14: C43.2 C44.2 C45.C JP15.3 U15.7
GND15: C46.2 C47.2 C48.C JP16.3 U16.7
GND16: C49.2 C50.2 C51.C JP17.3 U17.7
GND17: C52.2 C53.2 C54.C JP18.3 U18.7
GND18: C55.2 C56.2 C57.C JP19.3 U19.7
GND19: C58.2 C59.2 C60.C JP20.3 U20.7
GND20: C61.2 C62.2 C63.C JP21.3 U21.7
GND21: C64.2 C65.2 C66.C JP22.3 U22.7
GND22: C67.2 C68.2 C69.C JP23.3 U23.7
GND23: C70.2 C71.2 C72.C JP24.3 U24.7
GND24: C73.2 C74.2 C75.C JP25.3 U25.7
GND25: C76.2 C77.2 C78.C JP26.3 U26.7
GND26: C79.2 C80.2 C81.C JP27.3 U27.7
GND27: C82.2 C83.2 C84.C JP28.3 U28.7
GND28: C85.2 C86.2 C87.C JP29.3 U29.7
GND29: C88.2 C89.2 C90.C JP30.3 U30.7
GND30: C91.2 C92.2 C93.C JP31.3 U31.7
GND31: C94.2 C95.2 C96.C JP32.3 U32.7
GND32: C97.2 C98.2 C99.C JP33.3 U33.7
GND33: C100.2 C101.2 C102.C JP34.3 U34.7
GND34: C103.2 C104.2 C105.C JP35.3 U35.7
GND35: C106.2 C107.2 C108.C JP36.3 U36.7
N$1: R1.2 SJ1.3
N$2: R2.2 SJ1.1
N$3: R3.2 SJ3.3
N$4: R4.2 SJ3.1
N$5: R5.2 SJ5.3
N$6: R6.2 SJ5.1
N$7: R7.2 SJ7.3
N$8: R8.2 SJ7.1
N$9: R9.2 SJ9.3
N$10: R10.2 SJ9.1
N$11: R11.2 SJ11.3
N$12: R12.2 SJ11.1
N$13: R13.2 SJ13.3
N$14: R14.2 SJ13.1
N$15: R15.2 SJ15.3
N$16: R16.2 SJ15.1
N$17: R17.2 SJ17.3
N$18: R18.2 SJ17.1
N$19: R19.2 SJ19.3
N$20: R20.2 SJ19.1
N$21: R21.2 SJ21.3
N$22: R22.2 SJ21.1
N$23: R23.2 SJ23.3
N$24: R24.2 SJ23.1
N$25: R25.2 SJ25.3
N$26: R26.2 SJ25.1
N$27: R27.2 SJ27.3
N$28: R28.2 SJ27.1
N$29: R29.2 SJ29.3
N$30: R30.2 SJ29.1
N$31: R31.2 SJ31.3
N$32: R32.2 SJ31.1
N$33: R33.2 SJ33.3
N$34: R34.2 SJ33.1
N$35: R35.2 SJ35.3
N$36: R36.2 SJ35.1
N$37: R37.2 SJ37.3
N$38: R38.2 SJ37.1
N$39: R39.2 SJ39.3
N$40: R40.2 SJ39.1
N$41: R41.2 SJ41.3
N$42: R42.2 SJ41.1
N$43: R43.2 SJ43.3
N$44: R44.2 SJ43.1
N$45: R45.2 SJ45.3
N$46: R46.2 SJ45.1
N$47: R47.2 SJ47.3
N$48: R48.2 SJ47.1
N$49: R49.2 SJ49.3
N$50: R50.2 SJ49.1
N$51: R51.2 SJ51.3
N$52: R52.2 SJ51.1
N$53: R53.2 SJ53.3
N$54: R54.2 SJ53.1
N$55: R55.2 SJ55.3
N$56: R56.2 SJ55.1
N$57: R57.2 SJ57.3
N$58: R58.2 SJ57.1
N$59: R59.2 SJ59.3
N$60: R60.2 SJ59.1
N$61: R61.2 SJ61.3
N$62: R62.2 SJ61.1
N$63: R63.2 SJ63.3
N$64: R64.2 SJ63.1
N$65: R65.2 SJ65.3
N$66: R66.2 SJ65.1
N$67: R67.2 SJ67.3
N$68: R68.2 SJ67.1
N$69: R69.2 SJ69.3
N$70: R70.2 SJ69.1
N$71: R71.2 SJ71.3
N$72: R72.2 SJ71.1
SCL: JP1.4 R2.1 U1.5
SCL1: JP2.4 R4.1 U2.5
SCL2: JP3.4 R6.1 U3.5
SCL3: JP4.4 R8.1 U4.5
SCL4: JP5.4 R10.1 U5.5
SCL5: JP6.4 R12.1 U6.5
SCL6: JP7.4 R14.1 U7.5
SCL7: JP8.4 R16.1 U8.5
SCL8: JP9.4 R18.1 U9.5
SCL9: JP10.4 R20.1 U10.5
SCL10: JP11.4 R22.1 U11.5
SCL11: JP12.4 R24.1 U12.5
SCL12: JP13.4 R26.1 U13.5
SCL13: JP14.4 R28.1 U14.5
SCL14: JP15.4 R30.1 U15.5
SCL15: JP16.4 R32.1 U16.5
SCL16: JP17.4 R34.1 U17.5
SCL17: JP18.4 R36.1 U18.5
SCL18: JP19.4 R38.1 U19.5
SCL19: JP20.4 R40.1 U20.5
SCL20: JP21.4 R42.1 U21.5
SCL21: JP22.4 R44.1 U22.5
SCL22: JP23.4 R46.1 U23.5
SCL23: JP24.4 R48.1 U24.5
SCL24: JP25.4 R50.1 U25.5
SCL25: JP26.4 R52.1 U26.5
SCL26: JP27.4 R54.1 U27.5
SCL27: JP28.4 R56.1 U28.5
SCL28: JP29.4 R58.1 U29.5
SCL29: JP30.4 R60.1 U30.5
SCL30: JP31.4 R62.1 U31.5
SCL31: JP32.4 R64.1 U32.5
SCL32: JP33.4 R66.1 U33.5
SCL33: JP34.4 R68.1 U34.5
SCL34: JP35.4 R70.1 U35.5
SCL35: JP36.4 R72.1 U36.5
SDA: JP1.5 R1.1 U1.6
SDA1: JP2.5 R3.1 U2.6
SDA2: JP3.5 R5.1 U3.6
SDA3: JP4.5 R7.1 U4.6
SDA4: JP5.5 R9.1 U5.6
SDA5: JP6.5 R11.1 U6.6
SDA6: JP7.5 R13.1 U7.6
SDA7: JP8.5 R15.1 U8.6
SDA8: JP9.5 R17.1 U9.6
SDA9: JP10.5 R19.1 U10.6
SDA10: JP11.5 R21.1 U11.6
SDA11: JP12.5 R23.1 U12.6
SDA12: JP13.5 R25.1 U13.6
SDA13: JP14.5 R27.1 U14.6
SDA14: JP15.5 R29.1 U15.6
SDA15: JP16.5 R31.1 U16.6
SDA16: JP17.5 R33.1 U17.6
SDA17: JP18.5 R35.1 U18.6
SDA18: JP19.5 R37.1 U19.6
SDA19: JP20.5 R39.1 U20.6
SDA20: JP21.5 R41.1 U21.6
SDA21: JP22.5 R43.1 U22.6
SDA22: JP23.5 R45.1 U23.6
SDA23: JP24.5 R47.1 U24.6
SDA24: JP25.5 R49.1 U25.6
SDA25: JP26.5 R51.1 U26.6
SDA26: JP27.5 R53.1 U27.6
SDA27: JP28.5 R55.1 U28.6
SDA28: JP29.5 R57.1 U29.6
SDA29: JP30.5 R59.1 U30.6
SDA30: JP31.5 R61.1 U31.6
SDA31: JP32.5 R63.1 U32.6
SDA32: JP33.5 R65.1 U33.6
SDA33: JP34.5 R67.1 U34.6
SDA34: JP35.5 R69.1 U35.6
SDA35: JP36.5 R71.1 U36.6
VDD: C1.1 C3.A JP1.2 SJ2.1 U1.2
VDD1: C4.1 C6.A JP2.2 SJ4.1 U2.2
VDD2: C7.1 C9.A JP3.2 SJ6.1 U3.2
VDD3: C10.1 C12.A JP4.2 SJ8.1 U4.2
VDD4: C13.1 C15.A JP5.2 SJ10.1 U5.2
VDD5: C16.1 C18.A JP6.2 SJ12.1 U6.2
VDD6: C19.1 C21.A JP7.2 SJ14.1 U7.2
VDD7: C22.1 C24.A JP8.2 SJ16.1 U8.2
VDD8: C25.1 C27.A JP9.2 SJ18.1 U9.2
VDD9: C28.1 C30.A JP10.2 SJ20.1 U10.2
VDD10: C31.1 C33.A JP11.2 SJ22.1 U11.2
VDD11: C34.1 C36.A JP12.2 SJ24.1 U12.2
VDD12: C37.1 C39.A JP13.2 SJ26.1 U13.2
VDD13: C40.1 C42.A JP14.2 SJ28.1 U14.2
VDD14: C43.1 C45.A JP15.2 SJ30.1 U15.2
VDD15: C46.1 C48.A JP16.2 SJ32.1 U16.2
VDD16: C49.1 C51.A JP17.2 SJ34.1 U17.2
VDD17: C52.1 C54.A JP18.2 SJ36.1 U18.2
VDD18: C55.1 C57.A JP19.2 SJ38.1 U19.2
VDD19: C58.1 C60.A JP20.2 SJ40.1 U20.2
VDD20: C61.1 C63.A JP21.2 SJ42.1 U21.2
VDD21: C64.1 C66.A JP22.2 SJ44.1 U22.2
VDD22: C67.1 C69.A JP23.2 SJ46.1 U23.2
VDD23: C70.1 C72.A JP24.2 SJ48.1 U24.2
VDD24: C73.1 C75.A JP25.2 SJ50.1 U25.2
VDD25: C76.1 C78.A JP26.2 SJ52.1 U26.2
VDD26: C79.1 C81.A JP27.2 SJ54.1 U27.2
VDD27: C82.1 C84.A JP28.2 SJ56.1 U28.2
VDD28: C85.1 C87.A JP29.2 SJ58.1 U29.2
VDD29: C88.1 C90.A JP30.2 SJ60.1 U30.2
VDD30: C91.1 C93.A JP31.2 SJ62.1 U31.2
VDD31: C94.1 C96.A JP32.2 SJ64.1 U32.2
VDD32: C97.1 C99.A JP33.2 SJ66.1 U33.2
VDD33: C100.1 C102.A JP34.2 SJ68.1 U34.2
VDD34: C103.1 C105.A JP35.2 SJ70.1 U35.2
VDD35: C106.1 C108.A JP36.2 SJ72.1 U36.2
VDDIO: C2.1 JP1.1 SJ1.2 SJ2.2 U1.3
VDDIO1: C5.1 JP2.1 SJ3.2 SJ4.2 U2.3
VDDIO2: C8.1 JP3.1 SJ5.2 SJ6.2 U3.3
VDDIO3: C11.1 JP4.1 SJ7.2 SJ8.2 U4.3
VDDIO4: C14.1 JP5.1 SJ9.2 SJ10.2 U5.3
VDDIO5: C17.1 JP6.1 SJ11.2 SJ12.2 U6.3
VDDIO6: C20.1 JP7.1 SJ13.2 SJ14.2 U7.3
VDDIO7: C23.1 JP8.1 SJ15.2 SJ16.2 U8.3
VDDIO8: C26.1 JP9.1 SJ17.2 SJ18.2 U9.3
VDDIO9: C29.1 JP10.1 SJ19.2 SJ20.2 U10.3
VDDIO10: C32.1 JP11.1 SJ21.2 SJ22.2 U11.3
VDDIO11: C35.1 JP12.1 SJ23.2 SJ24.2 U12.3
VDDIO12: C38.1 JP13.1 SJ25.2 SJ26.2 U13.3
VDDIO13: C41.1 JP14.1 SJ27.2 SJ28.2 U14.3
VDDIO14: C44.1 JP15.1 SJ29.2 SJ30.2 U15.3
VDDIO15: C47.1 JP16.1 SJ31.2 SJ32.2 U16.3
VDDIO16: C50.1 JP17.1 SJ33.2 SJ34.2 U17.3
VDDIO17: C53.1 JP18.1 SJ35.2 SJ36.2 U18.3
VDDIO18: C56.1 JP19.1 SJ37.2 SJ38.2 U19.3
VDDIO19: C59.1 JP20.1 SJ39.2 SJ40.2 U20.3
VDDIO20: C62.1 JP21.1 SJ41.2 SJ42.2 U21.3
VDDIO21: C65.1 JP22.1 SJ43.2 SJ44.2 U22.3
VDDIO22: C68.1 JP23.1 SJ45.2 SJ46.2 U23.3
VDDIO23: C71.1 JP24.1 SJ47.2 SJ48.2 U24.3
VDDIO24: C74.1 JP25.1 SJ49.2 SJ50.2 U25.3
VDDIO25: C77.1 JP26.1 SJ51.2 SJ52.2 U26.3
VDDIO26: C80.1 JP27.1 SJ53.2 SJ54.2 U27.3
VDDIO27: C83.1 JP28.1 SJ55.2 SJ56.2 U28.3
VDDIO28: C86.1 JP29.1 SJ57.2 SJ58.2 U29.3
VDDIO29: C89.1 JP30.1 SJ59.2 SJ60.2 U30.3
VDDIO30: C92.1 JP31.1 SJ61.2 SJ62.2 U31.3
VDDIO31: C95.1 JP32.1 SJ63.2 SJ64.2 U32.3
VDDIO32: C98.1 JP33.1 SJ65.2 SJ66.2 U33.3
VDDIO33: C101.1 JP34.1 SJ67.2 SJ68.2 U34.3
VDDIO34: C104.1 JP35.1 SJ69.2 SJ70.2 U35.3
VDDIO35: C107.1 JP36.1 SJ71.2 SJ72.2 U36.3